# EAGLE board Grid (EAGLE 7.1.0), part 1 of 2
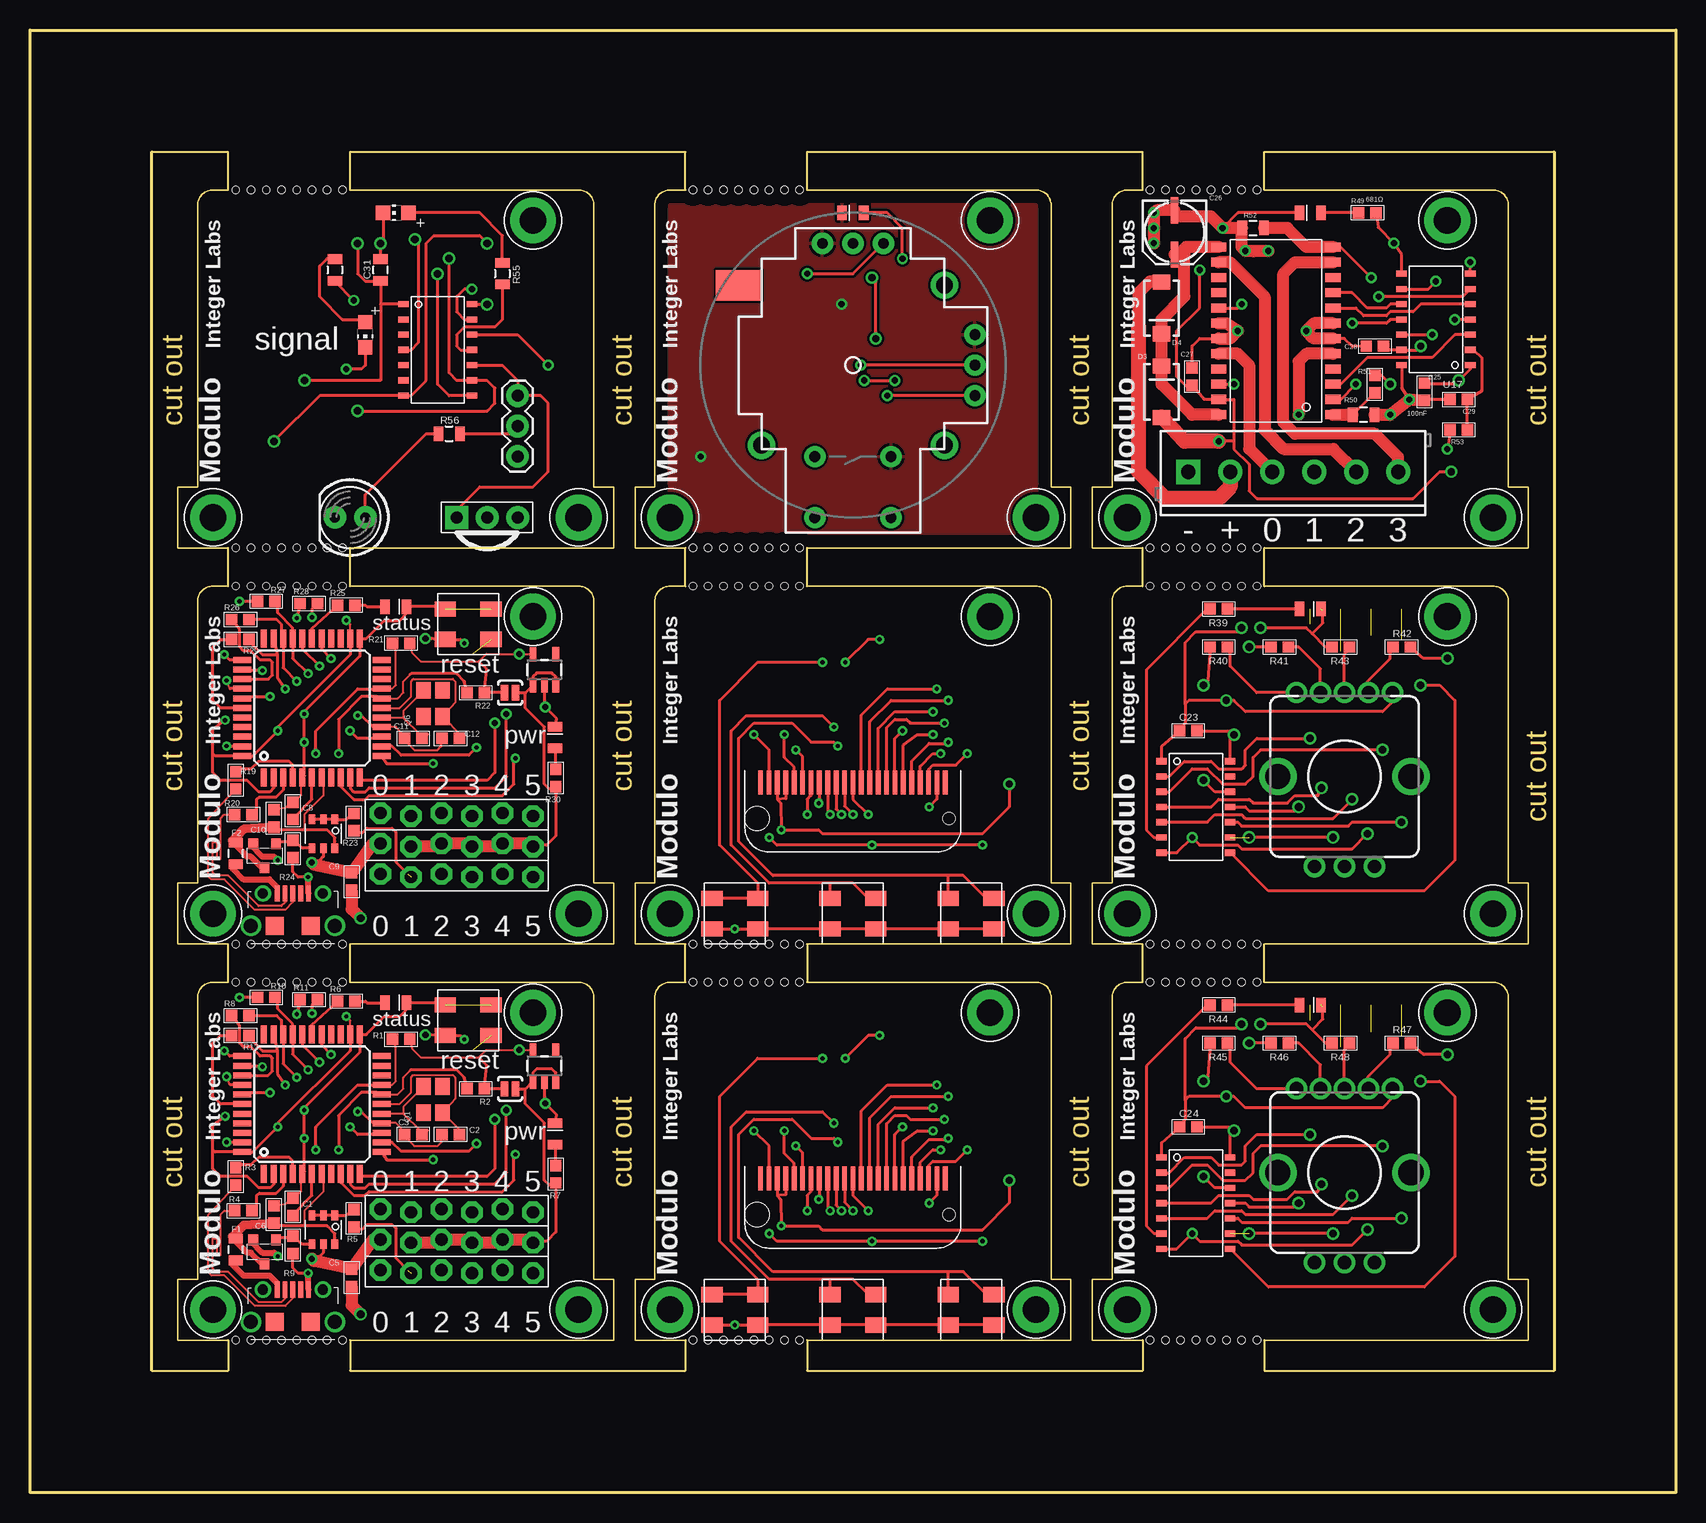
[diagram p0: board, top side]
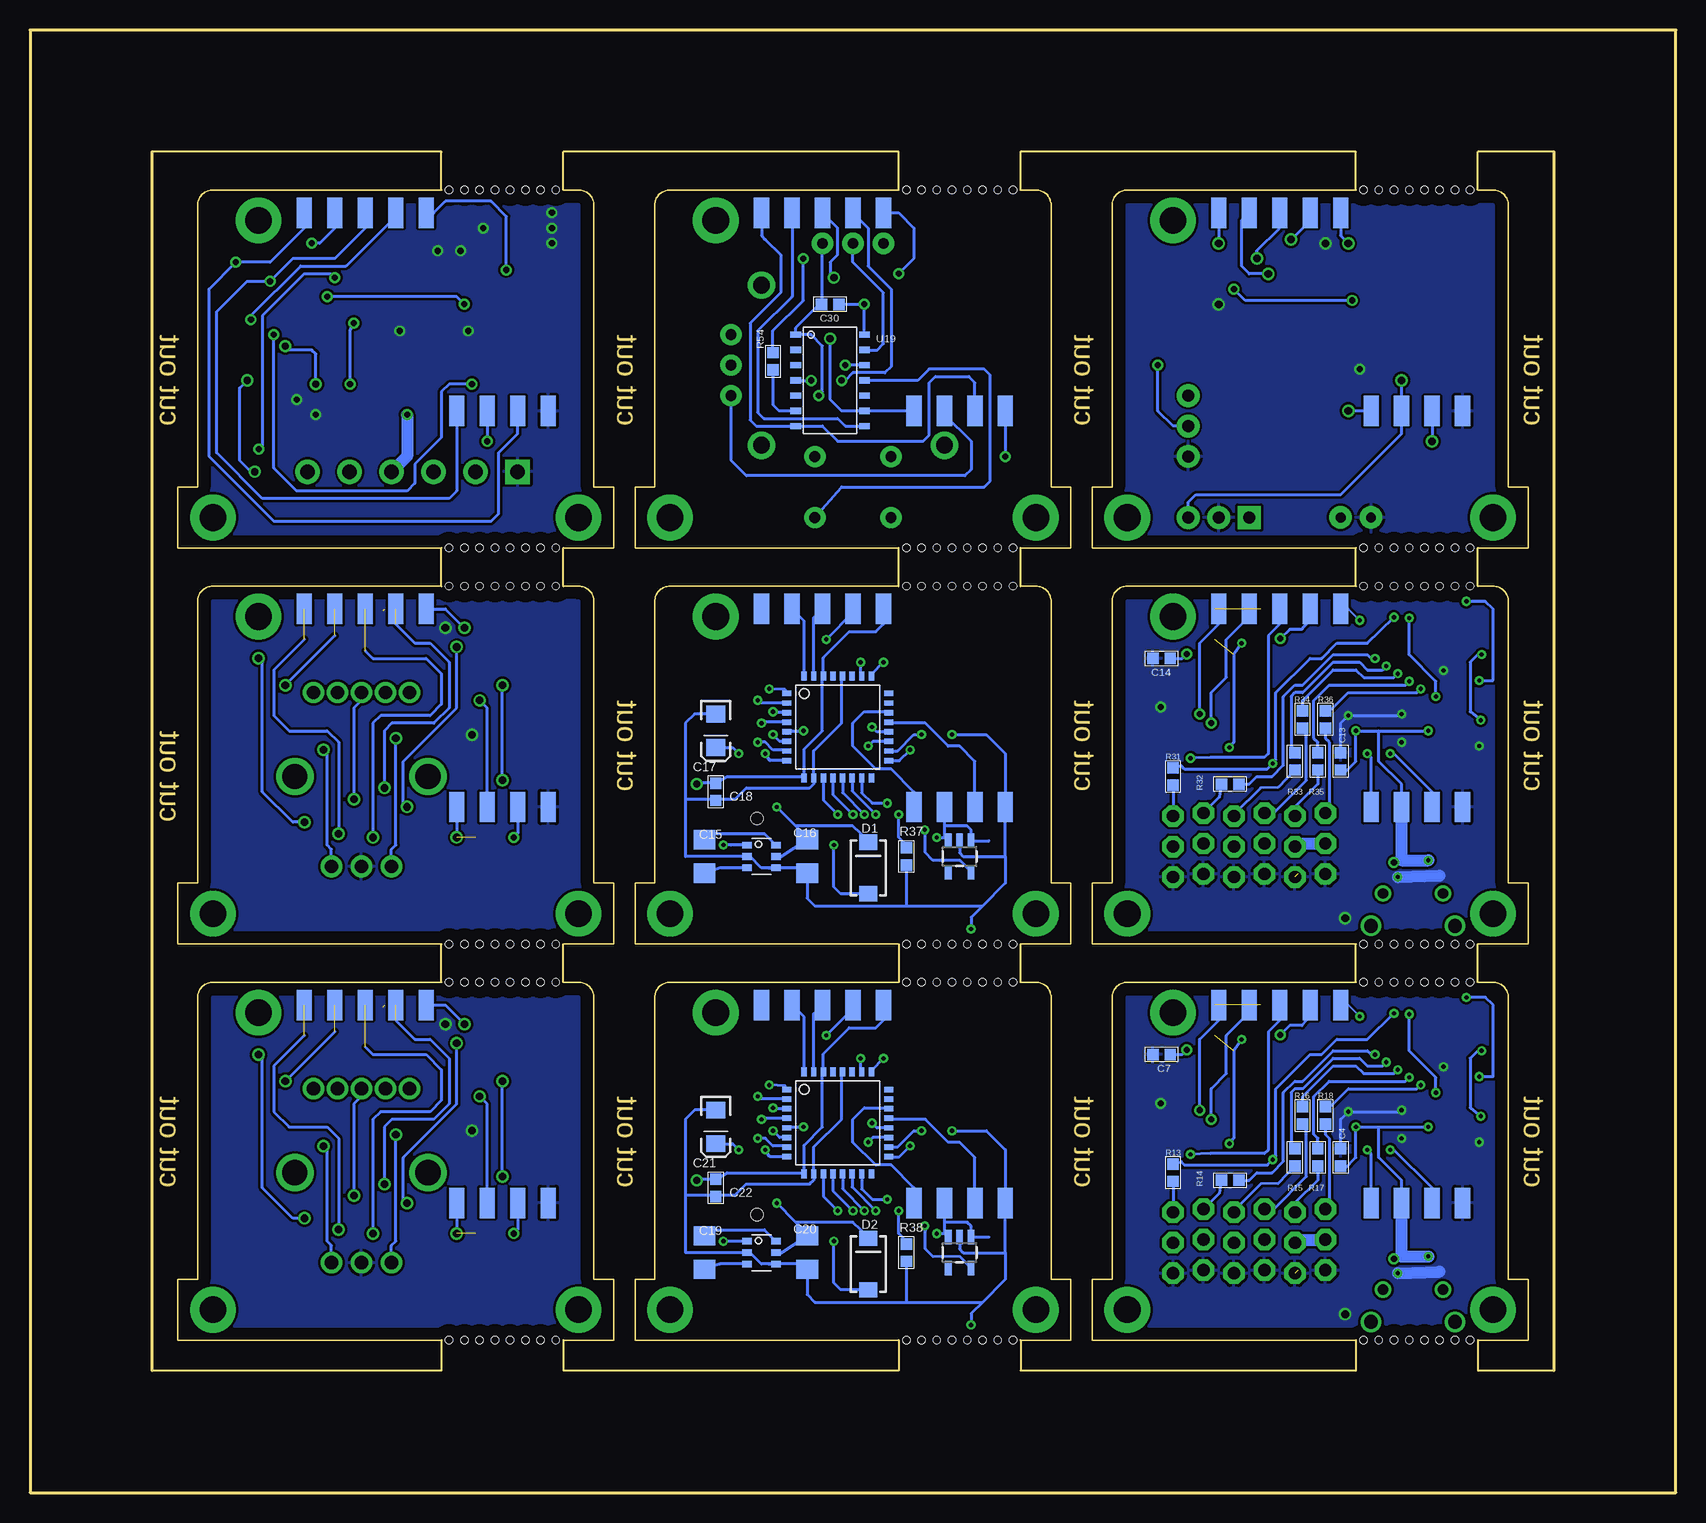
[diagram p1: board, bottom side, seen from below]

Size 137.16 x 121.92 mm. Coordinates in mm from the lower left corner, seen from the top.
Outline: 16.51,75.56 16.51,78.74
Outline: 54.61,75.56 54.61,78.74
Outline: 64.77,75.56 64.77,78.74
Outline: 26.67,75.56 26.67,78.74
Outline: 92.71,75.56 92.71,78.74
Outline: 102.87,75.56 102.87,78.74
Outline: 102.87,42.55 102.87,45.72
Outline: 92.71,42.55 92.71,45.72
Outline: 102.87,12.7 102.87,10.16 127,10.16 127,111.76 102.87,111.76 102.87,108.59
Outline: 54.61,12.7 54.61,10.16 26.67,10.16 26.67,12.7
Outline: 54.61,42.55 54.61,45.72
Outline: 64.77,12.7 64.77,10.16 92.71,10.16 92.71,12.7
Outline: 64.77,45.72 64.77,42.55
Outline: 26.67,42.55 26.67,45.72
Outline: 16.51,42.55 16.51,45.72
Outline: 16.51,108.59 16.51,111.76 10.16,111.76 10.16,10.16 16.51,10.16 16.51,12.7
Outline: 26.67,108.59 26.67,111.76 54.61,111.76 54.61,108.59
Outline: 64.77,108.59 64.77,111.76 92.71,111.76 92.71,108.59
Outline: 0,121.92 137.16,121.92 137.16,0 0,0 0,121.92
Copper layers (1*16): Top 0.035mm / dielectric 1.5mm / Bottom 0.035mm
Design rules "default": minimum track width 10mil, minimum drill 0.6mm, track to track 8mil, track to pad 8mil, pad to pad 8mil, via to via 8mil, smd to smd 8mil, copper to edge 40mil, drill to drill 8mil, minimum pad ring 10mil, minimum via ring 8mil, stop-mask expansion 4mil, vias tented up to drill 0mil, thermal gap 10mil

## Footprints (pad centres in the part's own frame; a part is rotated, then mirrored left to right if it is on the bottom)
0603 = smd 0.95 x 0.95: 1 -0.725,0; 2 0.725,0
C1206 = smd 1.6 x 1.8: 1 -1.4,0; 2 1.4,0
EIA3216 = smd 1.4 x 1.6: A 1.4,0; C -1.4,0
PANASONIC_C = smd 2.2 x 0.65: + 1.9,-0.2; - -1.8,-0.2
0805 = smd 0.8 x 1.2: 1 -0.9,0; 2 0.9,0
SMA-DIODE = smd 1.27 x 1.47: A -2.15,0; C 2.15,0
DEVICE-PCB-TABS = smd 1.27 x 2.54 bottom: BUS0 5.08,11.43; BUS1 7.62,11.43; BUS2 10.16,11.43; BUS3 12.7,11.43; PROG0 15.24,27.94; PROG1 17.78,27.94; PROG2 20.32,27.94; PROG3 22.86,27.94; PROG4 25.4,27.94 | drill 2.223 pad 3.81: P$1 2.54,2.54; P$2 33.02,2.54; P$3 29.21,27.305 | hole 0.6: 4.445,29.845; 5.715,29.845; 6.985,29.845; 8.255,29.845; 9.525,29.845; 10.795,29.845; 12.065,29.845; 13.335,29.845; 4.445,0; 5.715,0; 6.985,0; 8.255,0; 9.525,0; 10.795,0; 12.065,0; 13.335,0
1X06-BIGLOCK = drill 1.016 pad 1.778 octagon: 1 -6.35,0.127; 2 -3.81,-0.127; 3 -1.27,0.127; 4 1.27,-0.127; 5 3.81,0.127; 6 6.35,-0.127
SCREWTERMINAL-3.5MM-6 = drill 1.2 pad 2.032 square: 1 0,0 | drill 1.2 pad 2.032: 2 3.5,0; 3 7,0; 4 10.5,0; 5 14,0; 6 17.5,0
1X03 = drill 1.016 pad 1.88: 1 0,0; 2 2.54,0; 3 5.08,0
0805-LED = smd 1.2 x 0.8: A 0,-0.9; C 0,0.9
CHIP-LED0805 = smd 1.2 x 1.2: A 0,-1.05; C 0,1.05
LED5MM = drill 0.813 pad 1.88: A -1.27,0; K 1.27,0
NX3225 = smd 1.4 x 1.2: 1 -1.1,-0.8; 2 1.1,-0.8; 3 1.1,0.8; 4 -1.1,0.8
SOT-26 = smd 0.55 x 0.8: 1 -0.95,-1.2; 2 0,-1.2; 3 0.95,-1.2; 4 0.95,1.2; 5 0,1.2; 6 -0.95,1.2
MICRO3 = smd 0.8 x 0.9: 1 -0.95,-1; 2 0.95,-1; 3 0,1
SJ_2S-NO = smd 0.635 x 1.27: 1 -0.45,0; 2 0.45,0
BOURNS-7914J = smd 1.27 x 1.778: NEG$1 1.27,1.905; NEG$2 1.27,-1.905; POS$1 -1.27,1.905; POS$2 -1.27,-1.905
ENCODER_LED_3 = drill 1.1 pad 1.778: 1 -4,7; 2 -2,7; 3 0,7; 4 2,7; 5 4,7 | drill 1.1 pad 1.8: A -2.5,-7.5; B 2.5,-7.5; C 0,-7.5 | drill 2.1: M1 -5.55,0; M2 5.55,0
SOT23-5 = smd 0.55 x 1.2: 1 -0.95,-1.3; 2 0,-1.3; 3 0.95,-1.3; 4 0.95,1.3; 5 -0.95,1.3
SPARKFUN-DIGITALIC_TQFP44 = smd 1.5 x 0.5: 1 -5.8,4; 2 -5.8,3.2; 3 -5.8,2.4; 4 -5.8,1.6; 5 -5.8,0.8; 6 -5.8,0; 7 -5.8,-0.8; 8 -5.8,-1.6; 9 -5.8,-2.4; 10 -5.8,-3.2; 11 -5.8,-4; 23 5.8,-4; 24 5.8,-3.2; 25 5.8,-2.4; 26 5.8,-1.6; 27 5.8,-0.8; 28 5.8,0; 29 5.8,0.8; 30 5.8,1.6; 31 5.8,2.4; 32 5.8,3.2; 33 5.8,4 | smd 0.5 x 1.5: 12 -4,-5.8; 13 -3.2,-5.8; 14 -2.4,-5.8; 15 -1.6,-5.8; 16 -0.8,-5.8; 17 0,-5.8; 18 0.8,-5.8; 19 1.6,-5.8; 20 2.4,-5.8; 21 3.2,-5.8; 22 4,-5.8; 34 4,5.8; 35 3.2,5.8; 36 2.4,5.8; 37 1.6,5.8; 38 0.8,5.8; 39 0,5.8; 40 -0.8,5.8; 41 -1.6,5.8; 42 -2.4,5.8; 43 -3.2,5.8; 44 -4,5.8
USB-MICROB-FCI = smd 0.4 x 1.35: P1 -1.3,2.7; P2 -0.65,2.7; P3 0,2.7; P4 0.65,2.7; P5 1.3,2.7 | drill 0.85: S1 -2.5,2.7; S2 2.5,2.7 | drill 1.15: S3 -3.5,0; S6 3.5,0 | smd 1.5 x 1.5: S4 -1.5,0; S5 1.5,0
TQFP-32 = smd 0.75 x 0.45: 1 -4.25,2.8; 2 -4.25,2; 3 -4.25,1.2; 4 -4.25,0.4; 5 -4.25,-0.4; 6 -4.25,-1.2; 7 -4.25,-2; 8 -4.25,-2.8; 17 4.25,-2.8; 18 4.25,-2; 19 4.25,-1.2; 20 4.25,-0.4; 21 4.25,0.4; 22 4.25,1.2; 23 4.25,2; 24 4.25,2.8 | smd 0.45 x 0.75: 9 -2.8,-4.25; 10 -2,-4.25; 11 -1.2,-4.25; 12 -0.4,-4.25; 13 0.4,-4.25; 14 1.2,-4.25; 15 2,-4.25; 16 2.8,-4.25; 25 2.8,4.25; 26 2,4.25; 27 1.2,4.25; 28 0.4,4.25; 29 -0.4,4.25; 30 -1.2,4.25; 31 -2,4.25; 32 -2.8,4.25
FPC-24-REVERSE = smd 0.4 x 2: 1 7.7,1; 2 7,1; 3 6.3,1; 4 5.6,1; 5 4.9,1; 6 4.2,1; 7 3.5,1; 8 2.8,1; 9 2.1,1; 10 1.4,1; 11 0.7,1; 12 0,1; 13 -0.7,1; 14 -1.4,1; 15 -2.1,1; 16 -2.8,1; 17 -3.5,1; 18 -4.2,1; 19 -4.9,1; 20 -5.6,1; 21 -6.3,1; 22 -7,1; 23 -7.7,1 | hole 1: -8,4
SOIC14 = smd 0.508 x 0.889: 1 0,-3.175; 2 1.27,-3.175; 3 2.54,-3.175; 4 3.81,-3.175; 5 5.08,-3.175; 6 6.35,-3.175; 7 7.62,-3.175; 8 7.62,2.54; 9 6.35,2.54; 10 5.08,2.54; 11 3.81,2.54; 12 2.54,2.54; 13 1.27,2.54; 14 0,2.54
SOIC-14 = smd 0.508 x 0.889: 1 0,-3.175; 2 1.27,-3.175; 3 2.54,-3.175; 4 3.81,-3.175; 5 5.08,-3.175; 6 6.35,-3.175; 7 7.62,-3.175; 8 7.62,2.54; 9 6.35,2.54; 10 5.08,2.54; 11 3.81,2.54; 12 2.54,2.54; 13 1.27,2.54; 14 0,2.54
SOP-24-E3 = smd 0.762 x 1.27: 1 -6.35,-4.445; 2 -5.08,-4.445; 3 -3.81,-4.445; 4 -2.54,-4.445; 5 -1.27,-4.445; 6 0,-4.445; 7 1.27,-4.445; 8 2.54,-4.445; 9 3.81,-4.445; 10 5.08,-4.445; 11 6.35,-4.445; 12 7.62,-4.445; 13 7.62,5.08; 14 6.35,5.08; 15 5.08,5.08; 16 3.81,5.08; 17 2.54,5.08; 18 1.27,5.08; 19 0,5.08; 20 -1.27,5.08; 21 -2.54,5.08; 22 -3.81,5.08; 23 -5.08,5.08; 24 -6.35,5.08
JOYSTICK = drill 0.9 pad 1.778: B1A -3.175,12.7; B1B 3.175,12.7; B2A -3.175,7.62; B2B 3.175,7.62 | drill 0.889 pad 1.778: H1 -2.54,-10.16; H2 0,-10.16; H3 2.54,-10.16; V1 -10.16,2.54; V2 -10.16,0; V3 -10.16,-2.54 | drill 1.397 pad 2.286: MOUNT1 -7.62,6.668; MOUNT2 -7.62,-6.668; MOUNT4 7.62,6.668 | smd 3.81 x 2.54: MOUNT3 9.525,-6.668
PNA460XM = drill 1.016 pad 1.93 square: 1 -2.54,0 | drill 1.016 pad 1.93: 2 0,0; 3 2.54,0

## Placement (x,y rotation side)
C1  1uF  [0603]  21.91,23.81 90 top
C2  18pF  [0603]  35.05,29.84 180 top
C3  18pF  [0603]  31.94,29.84 180 top
C4  100nF  [0603]  27.94,27.94 90 bottom
C5  10uF  [0603]  26.8,17.91 270 top
C6  10uF  [0603]  20.32,23.18 90 top
C7  100nF  [0603]  42.86,36.51 180 bottom
C8  1uF  [0603]  21.91,56.83 90 top
C9  10uF  [0603]  26.8,50.93 270 top
C10  10uF  [0603]  20.32,56.2 90 top
C11  18pF  [0603]  31.94,62.86 180 top
C12  18pF  [0603]  35.05,62.86 180 top
C13  100nF  [0603]  27.94,60.96 90 bottom
C14  100nF  [0603]  42.86,69.53 180 bottom
C15  10uF  [C1206]  80.96,53.02 270 bottom
C16  10uF  [C1206]  72.39,53.02 270 bottom
C17  T491A475M020AT  [EIA3216]  80.01,63.5 270 bottom
C18  100nF  [0603]  80.01,58.42 270 bottom
C19  10uF  [C1206]  80.96,20 270 bottom
C20  10uF  [C1206]  72.39,20 270 bottom
C21  T491A475M020AT  [EIA3216]  80.01,30.48 270 bottom
C22  100nF  [0603]  80.01,25.4 270 bottom
C23  100nF  [0603]  96.52,63.5 0 top
C24  100nF  [0603]  96.52,30.48 0 top
C25  100nF  [0603]  116.2,91.76 90 top
C26  [PANASONIC_C]  95.57,105.09 270 top
C27  100nF  [0603]  96.84,93.03 90 top
C28  100nF  [0603]  112.08,95.57 180 top
C29  100nF  [0603]  119.06,91.12 180 top
C30  100nF  [0603]  70.48,99.06 180 bottom
C31  .47uF  [0805]  29.21,101.92 90 top
D1  SSA33L-E3/61T  [SMA-DIODE]  67.31,52.07 90 bottom
D2  SSA33L-E3/61T  [SMA-DIODE]  67.31,19.05 90 bottom
D3  [SMA-DIODE]  94.3,91.76 90 top
D4  [SMA-DIODE]  94.3,98.74 270 top
F1  MF-PSMF110X-2  [0805]  17.14,20.26 90 top
F2  MF-PSMF110X-2  [0805]  17.14,53.28 90 top
FOOTPRINT  DEVICE-PCB-TABS  [DEVICE-PCB-TABS]  12.7,12.7 0 top
FOOTPRINT1  DEVICE-PCB-TABS  [DEVICE-PCB-TABS]  12.7,45.72 0 top
JP1  [1X06-BIGLOCK]  35.56,23.49 180 top
JP2  [1X06-BIGLOCK]  35.56,18.41 0 top
JP3  [1X06-BIGLOCK]  35.56,20.95 0 top
JP4  [1X06-BIGLOCK]  35.56,56.52 180 top
JP5  [1X06-BIGLOCK]  35.56,51.44 0 top
JP6  [1X06-BIGLOCK]  35.56,53.97 0 top
JP7  [SCREWTERMINAL-3.5MM-6]  96.52,85.09 0 top
JP8  [1X03]  40.64,86.36 90 top
LED  blue  [0805-LED]  106.68,106.68 90 top
LED1  blue  [0805-LED]  30.48,40.83 270 top
LED2  blue  [0805-LED]  43.75,29.91 0 top
LED3  blue  [0805-LED]  30.48,73.85 270 top
LED4  blue  [0805-LED]  43.75,62.93 0 top
LED5  blue  [0805-LED]  106.68,73.66 270 top
LED6  blue  [0805-LED]  106.68,40.64 270 top
LED7  blue  [0805-LED]  68.58,106.68 90 top
LED8  [CHIP-LED0805]  30.48,106.68 90 top
LED9  [LED5MM]  26.67,81.28 180 top
LED10  [CHIP-LED0805]  27.94,96.52 180 top
PCB1  DEVICE-PCB-TABS  [DEVICE-PCB-TABS]  50.8,45.72 0 top
PCB2  DEVICE-PCB-TABS  [DEVICE-PCB-TABS]  50.8,12.7 0 top
PCB3  DEVICE-PCB-TABS  [DEVICE-PCB-TABS]  88.9,45.72 0 top
PCB4  DEVICE-PCB-TABS  [DEVICE-PCB-TABS]  88.9,12.7 0 top
PCB5  DEVICE-PCB-TABS  [DEVICE-PCB-TABS]  88.9,78.74 0 top
Q1  16Mhz  [NX3225]  33.59,32.77 90 top
Q2  DMMT5401  [SOT-26]  24.45,21.91 180 top
Q3  DMG2305UX  [MICRO3]  19.56,20.07 180 top
Q4  DMMT5401  [SOT-26]  24.45,54.93 180 top
Q5  DMG2305UX  [MICRO3]  19.56,53.09 180 top
Q6  16Mhz  [NX3225]  33.59,65.79 90 top
R1  1.5KΩ  [0603]  30.92,37.78 180 top
R2  1.5KΩ  [0603]  37.15,33.66 180 top
R3  22Ω  [0603]  17.14,26.35 90 top
R4  22Ω  [0603]  17.78,23.49 0 top
R5  10KΩ  [0603]  26.99,22.86 90 top
R6  681Ω  [0603]  26.35,40.96 0 top
R7  681Ω  [0603]  43.81,26.54 90 top
R8  1.5KΩ  [0603]  17.53,39.75 0 top
R9  47KΩ  [0603]  21.91,20.64 90 top
R10  1.5KΩ  [0603]  19.68,41.27 0 top
R11  1.5KΩ  [0603]  23.24,41.08 0 top
R12  1.5KΩ  [0603]  17.53,38.1 0 top
R13  150Ω  [0603]  41.91,26.67 270 bottom
R14  150Ω  [0603]  37.15,26.04 180 bottom
R15  150Ω  [0603]  31.75,27.94 270 bottom
R16  150Ω  [0603]  31.11,31.43 270 bottom
R17  150Ω  [0603]  29.84,27.94 270 bottom
R18  150Ω  [0603]  29.21,31.43 270 bottom
R19  22Ω  [0603]  17.14,59.37 90 top
R20  22Ω  [0603]  17.78,56.52 0 top
R21  1.5KΩ  [0603]  30.92,70.8 180 top
R22  1.5KΩ  [0603]  37.15,66.67 180 top
R23  10KΩ  [0603]  26.99,55.88 90 top
R24  47KΩ  [0603]  21.91,53.66 90 top
R25  681Ω  [0603]  26.35,73.98 0 top
R26  1.5KΩ  [0603]  17.53,72.77 0 top
R27  1.5KΩ  [0603]  19.68,74.3 0 top
R28  1.5KΩ  [0603]  23.24,74.1 0 top
R29  1.5KΩ  [0603]  17.53,71.12 0 top
R30  681Ω  [0603]  43.81,59.56 90 top
R31  150Ω  [0603]  41.91,59.69 270 bottom
R32  150Ω  [0603]  37.15,59.05 180 bottom
R33  150Ω  [0603]  31.75,60.96 270 bottom
R34  150Ω  [0603]  31.11,64.45 270 bottom
R35  150Ω  [0603]  29.84,60.96 270 bottom
R36  150Ω  [0603]  29.21,64.45 270 bottom
R37  700k  [0603]  64.14,53.02 270 bottom
R38  700k  [0603]  64.14,20 270 bottom
R39  681Ω  [0603]  99.06,73.66 180 top
R40  130  [0603]  99.06,70.48 180 top
R41  68.1Ω  [0603]  104.14,70.48 180 top
R42  68.1Ω  [0603]  114.3,70.48 0 top
R43  2k  [0603]  109.22,70.48 180 top
R44  681Ω  [0603]  99.06,40.64 180 top
R45  130  [0603]  99.06,37.47 180 top
R46  68.1Ω  [0603]  104.14,37.47 180 top
R47  68.1Ω  [0603]  114.3,37.47 0 top
R48  2k  [0603]  109.22,37.47 180 top
R49  681Ω  [0603]  111.44,106.68 0 top
R50  .05  [0805]  111.12,89.85 180 top
R51  1.5KΩ  [0603]  112.08,92.39 270 top
R52  .05  [0805]  101.92,105.41 0 top
R53  1.5KΩ  [0603]  119.06,88.58 180 top
R54  681Ω  [0603]  75.25,94.3 270 bottom
R55  680  [0805]  39.37,101.6 270 top
R56  130  [0805]  34.92,88.27 0 top
R57  680  [0805]  25.4,101.92 270 top
SJ1  SOLDERJUMPERNO  [SJ_2S-NO]  40,33.66 180 top
SJ2  SOLDERJUMPERNO  [SJ_2S-NO]  40,66.67 180 top
SW1  blue  [BOURNS-7914J]  36.51,39.37 90 top
SW2  blue  [BOURNS-7914J]  36.51,72.39 90 top
SW3  7914J-1-000E  [BOURNS-7914J]  58.74,48.26 270 top
SW4  7914J-1-000E  [BOURNS-7914J]  68.58,48.26 270 top
SW5  7914J-1-000E  [BOURNS-7914J]  78.42,48.26 270 top
SW6  7914J-1-000E  [BOURNS-7914J]  58.74,15.24 270 top
SW7  7914J-1-000E  [BOURNS-7914J]  68.58,15.24 270 top
SW8  7914J-1-000E  [BOURNS-7914J]  78.42,15.24 270 top
SW9  TopUp EC12PLRGBSDVBF-D  [ENCODER_LED_3]  109.54,59.69 0 top
SW10  TopUp EC12PLRGBSDVBF-D  [ENCODER_LED_3]  109.54,26.67 0 top
U1  MIC5205-3.3YM5 TR  [SOT23-5]  42.86,35.56 0 top
U2  ATMEGA32U4TQFP  [SPARKFUN-DIGITALIC_TQFP44]  23.49,32.38 90 top
U3  USBFCI-MICROB  [USB-MICROB-FCI]  21.91,14.22 0 top
U4  ATMEGA32U4TQFP  [SPARKFUN-DIGITALIC_TQFP44]  23.49,65.41 90 top
U5  USBFCI-MICROB  [USB-MICROB-FCI]  21.91,47.24 0 top
U6  MIC5205-3.3YM5 TR  [SOT23-5]  42.86,68.58 0 top
U7  MIC5205-3.3YM5 TR  [SOT23-5]  59.69,53.02 180 bottom
U8  ATSAMD21E18A-AU  [TQFP-32]  69.85,63.82 0 bottom
U9  LM2665M6/NOPB  [SOT-26]  76.2,53.02 270 bottom
U10  ER-OLED0.95-2C  [FPC-24-REVERSE]  68.58,60.2 180 top
U11  MIC5205-3.3YM5 TR  [SOT23-5]  59.69,20 180 bottom
U12  ATSAMD21E18A-AU  [TQFP-32]  69.85,30.8 0 bottom
U13  LM2665M6/NOPB  [SOT-26]  76.2,20 270 bottom
U14  ER-OLED0.95-2C  [FPC-24-REVERSE]  68.58,27.18 180 top
U15  attiny841-ssur  [SOIC14]  97.47,60.96 270 top
U16  attiny841-ssur  [SOIC14]  97.47,27.94 270 top
U17  ATTINY841  [SOIC-14]  116.84,93.98 90 top
U18  NJM2670  [SOP-24-E3]  104.14,96.2 90 top
U19  ATTINY841  [SOIC-14]  70.17,96.52 270 bottom
U20  JOYSTICKPTH  [JOYSTICK]  68.58,93.98 180 top
U$1  PNA460XM  [PNA460XM]  38.1,81.28 0 top
U$2  TINY841  [SOIC14]  34.29,99.06 270 top
U$3  DEVICE-PCB-TABS  [DEVICE-PCB-TABS]  12.7,78.74 0 top
U$7  DEVICE-PCB-TABS  [DEVICE-PCB-TABS]  50.8,78.74 0 top

## Library data of the parts
C1 C8 = Modulo; PARTNUM: C0603C105K4RACTU
C2 C3 C11 C12 = Modulo; PARTNUM: C0603C180J5GACTU
C4 C7 C13 C14 C18 C22-C25 C27-C30 = Modulo; PARTNUM: C0603C104K5RACTU
C5 C6 C9 C10 = Modulo; PARTNUM: GRM188R60J106ME47D
C15 C16 C19 C20 = Modulo; PARTNUM: CL31A106KAHNNNE
C17 C21 = SparkFun-Capacitors; PROD_ID: CAP-00811
C26 = SparkFun-Capacitors; PARTNUM: EEE-0JA101WR
C31 R55-R57 U15 U16 U$2 = IntegerLabs
D1-D4 = SparkFun-DiscreteSemi; PARTNUM: SSA33L-E3/61T
F1 F2 = Modulo; PARTNUM: MF-PSFM110X-2
FOOTPRINT FOOTPRINT1 PCB5 R37 R38 R40 R43 R45 R48 SW3-SW8 U7-U9 U11-U13 U$3 U$7 = Modulo
JP1-JP6 = adafruit; PARTNUM: PREC006SAAN-RC
JP7 = SparkFun-Connectors; PARTNUM: OSTTE060104
JP8 = SparkFun-Connectors
LED LED1-LED7 = Modulo; PARTNUM: LTST-C171TBKT
LED8 LED10 U$1 = adafruit
LED9 = SparkFun-LED
PCB1 PCB2 = Modulo; BOARD: Display; VERSION: 2
PCB3 PCB4 = Modulo; NOBOM: 1
Q1 Q6 = Modulo; PARTNUM: CX3225GB16000D0HEQCC
Q2 Q4 = IntegerLabs; PARTNUM: DMMT5401
Q3 Q5 = transistor-power; PARTNUM: DMG2305UX
R1 R2 R8 R10-R12 R21 R22 R26-R29 R51 R53 = Modulo; PARTNUM: ERJ-3EKF1501V
R3 R4 R19 R20 = Modulo; PARTNUM: ERJ-3EKF22R0V
R5 R23 = Modulo; PARTNUM: ERJ-3EKF1002V
R6 R7 R25 R30 R39 R44 R49 R54 = Modulo; PARTNUM: ERJ-3EKF6810V
R9 R24 = Modulo; PARTNUM: ERJ-3EKF4702V
R13-R18 R31-R36 = Modulo; PARTNUM: ERJ-3EKF1500V
R41 R42 R46 R47 = Modulo; PARTNUM: ERJ-3EKF68R1V
R50 R52 = Modulo; PARTNUM: CSR0805FKR500
SJ1 SJ2 = SparkFun-Passives; PARTNUM: EXCLUDE
SW1 SW2 = Modulo; PARTNUM: 7914J-1-000E
SW9 SW10 = SparkFun-Electromechanical
U1 U6 = Modulo; PARTNUM: MIC5205-3.3YM5 TR
U2 U4 = SparkFun-DigitalIC; PARTNUM: ATMEGA32U4TQFP; PROD_ID: IC-11161
U3 U5 = IntegerLabs; PARTNUM: 10118193-0001LF
U10 U14 = Modulo; MANUFACTURER: buydisplay.com; SUPPLIER: buydisplay.com
U17 U19 = Modulo; PARTNUM: ATTINY841-SSUR
U18 = IntegerLabs; PARTNUM: NJM2670E3
U20 = IntegerLabs; PARTNUM: https://www.sparkfun.com/products/9032

## Nets
+3.3V: C7.1 R1.1 R2.1 SJ1.2 U1.5
+3.3V1: C14.1 R21.1 R22.1 SJ2.2 U6.5
+3.3V2: C18.1 PCB1.PROG0 U7.5 U8.9 U8.30 U10.3 U10.4
+3.3V3: C22.1 PCB2.PROG0 U11.5 U12.9 U12.30 U14.3 U14.4
+5V: D1.A PCB1.BUS2 U7.1 U7.3 U9.1
+5V1: D2.A PCB2.BUS2 U11.1 U11.3 U13.1
+10V: C16.1 D1.C U9.5 U10.22
+10V1: C20.1 D2.C U13.5 U14.22
A: SW9.A U15.2
A1: SW10.A U16.2
B: SW9.B U15.3
B1: SW10.B U16.3
BLUE: R42.2 U15.10
BLUE1: R47.2 U16.10
BS0: U8.17 U10.6
BS1: U8.18 U10.5
BS2: U12.18 U14.5
BS3: U12.17 U14.6
BUTTON1: SW3.POS$1 SW3.POS$2 U8.25
BUTTON2: SW4.POS$1 SW4.POS$2 U8.20
BUTTON3: SW5.POS$1 SW5.POS$2 U8.19
BUTTON4: SW6.POS$1 SW6.POS$2 U12.25
BUTTON5: SW7.POS$1 SW7.POS$2 U12.20
BUTTON6: SW8.POS$1 SW8.POS$2 U12.19
CS: U8.15 U10.8
CS1: U12.15 U14.8
D0: R12.2 R18.1 U2.32
D1: R8.2 R17.1 U2.31
D2: R10.2 R16.1 U2.30
D3: R15.1 U2.29
D4: R14.1 U2.27
D5: R11.2 R13.1 U2.12
D6: R26.2 R35.1 U4.31
D7: R32.1 U4.27
D8: R33.1 U4.29
D9: R29.2 R36.1 U4.32
D10: R27.2 R34.1 U4.30
D11: R28.2 R31.1 U4.12
D12: U8.1 U10.13
D13: U8.2 U10.14
D14: U8.3 U10.15
D15: U8.4 U10.16
D16: U8.5 U10.17
D17: U8.6 U10.18
D18: U8.7 U10.19
D19: U8.8 U10.20
D20: U12.1 U14.13
D21: U12.2 U14.14
D22: U12.3 U14.15
D23: U12.4 U14.16
D24: U12.5 U14.17
D25: U12.6 U14.18
D26: U12.7 U14.19
D27: U12.8 U14.20
D+: R3.1 U3.P3
D+1: R19.1 U5.P3
D-: R4.1 U3.P2
D-1: R20.1 U5.P2
D/C: U8.13 U10.10
D/C1: U12.13 U14.10
DATA_LED: R57.2 U$2.13
DISPLAY_RESET: U8.14 U10.9
DISPLAY_RESET1: U12.14 U14.9
ENABLEA: U17.3 U18.3
ENABLEB: U17.10 U18.9
G1: Q1.2
G2: Q1.4
G3: Q6.2
G4: Q6.4
GND: C1.2 C2.2 C3.2 C4.2 C5.2 C6.2 C7.2 FOOTPRINT.BUS0 JP2.1 JP2.2 JP2.3 JP2.4 JP2.5 JP2.6 LED1.C LED2.C R5.1 R9.1 SW1.NEG$1 SW1.NEG$2 U1.2 U2.5 U2.15 U2.23 U2.35 U2.43 U3.P5
GND1: C8.2 C9.2 C10.2 C11.2 C12.2 C13.2 C14.2 FOOTPRINT1.BUS0 JP5.1 JP5.2 JP5.3 JP5.4 JP5.5 JP5.6 LED3.C LED4.C R23.1 R24.1 SW2.NEG$1 SW2.NEG$2 U4.5 U4.15 U4.23 U4.35 U4.43 U5.P5 U6.2
GND2: C16.2 C17.C C18.2 PCB1.BUS0 R37.2 SW3.NEG$1 SW3.NEG$2 SW4.NEG$1 SW4.NEG$2 SW5.NEG$1 SW5.NEG$2 U7.2 U8.10 U8.28 U9.2 U9.4 U10.2
GND3: C20.2 C21.C C22.2 PCB2.BUS0 R38.2 SW6.NEG$1 SW6.NEG$2 SW7.NEG$1 SW7.NEG$2 SW8.NEG$1 SW8.NEG$2 U11.2 U12.10 U12.28 U13.2 U13.4 U14.2
GND4: C23.2 LED5.C PCB3.BUS0 R43.2 SW9.C U15.14
GND5: C24.2 LED6.C PCB4.BUS0 R48.2 SW10.C U16.14
GND6: C25.1 C26.- C27.2 C28.2 C29.2 JP7.1 LED.C PCB5.BUS0 R50.1 R52.1 U17.14 U18.6 U18.7 U18.18 U18.19
GND7: C30.1 LED7.C U19.14 U20.B2A U20.H3 U20.V3 U$7.BUS0
GND8: C31.2 JP8.1 LED8.C LED9.K LED10.C U$1.2 U$2.14 U$3.BUS0
GREEN: R41.2 U15.11
GREEN1: R46.2 U16.11
H: U19.13 U20.H2
IN0: U17.11 U18.2
IN1: U17.12 U18.22
IN2: U17.5 U18.8
IN3: U17.6 U18.17
IR_LED: JP8.2 R56.2 U$2.12
IR_SENSE: JP8.3 U$1.1 U$2.10
LED: R6.1 U2.28
LED1: R25.1 U4.28
LED2: R39.2 U15.6
LED3: R44.2 U16.6
LED4: R54.2 U19.6
LED5: R55.2 U$2.11
MISO: FOOTPRINT.PROG3 U2.11
MISO1: FOOTPRINT1.PROG3 U4.11
MISO2: PCB3.PROG3 U15.8
MISO3: PCB4.PROG3 U16.8
MISO4: U19.8 U$7.PROG3
MISO5: U$2.8 U$3.PROG3
MISO/LED: PCB5.PROG3 R49.2 U17.8
MOSI: FOOTPRINT.PROG4 U2.10
MOSI1: FOOTPRINT1.PROG4 U4.10
N$1: C1.1 U2.6
N$2: JP1.1 R13.2
N$3: F1.1 U3.P1
N$4: C3.1 Q1.3 U2.16
N$5: LED1.A R6.2
N$6: R12.1 U2.39
N$7: R11.1 U2.38
N$8: R3.2 U2.4
N$9: R4.2 U2.3
N$10: R10.1 U2.37
N$11: R8.1 U2.36
N$12: LED2.A R7.2
N$13: JP1.2 R14.2
N$14: Q2.1 Q2.2 Q2.3 R5.2
N$15: C2.1 Q1.1 U2.17
N$16: Q2.4 Q3.1 R9.2
N$17: JP1.3 R15.2
N$18: JP1.4 R16.2
N$19: JP1.5 R17.2
N$20: JP1.6 R18.2
N$21: C8.1 U4.6
N$22: R19.2 U4.4
N$23: R20.2 U4.3
N$24: Q4.1 Q4.2 Q4.3 R23.2
N$25: Q4.4 Q5.1 R24.2
N$26: F2.1 U5.P1
N$27: LED3.A R25.2
N$28: C11.1 Q6.3 U4.16
N$29: R29.1 U4.39
N$30: R28.1 U4.38
N$31: R27.1 U4.37
N$32: R26.1 U4.36
N$33: LED4.A R30.2
N$34: C12.1 Q6.1 U4.17
N$35: JP4.1 R31.2
N$36: JP4.2 R32.2
N$37: JP4.3 R33.2
N$38: JP4.4 R34.2
N$39: JP4.5 R35.2
N$40: JP4.6 R36.2
N$42: C15.1 U9.6
N$43: C15.2 U9.3
N$44: C17.A U10.21
N$45: R37.1 U10.7
N$47: C19.1 U13.6
N$48: C19.2 U13.3
N$49: C21.A U14.21
N$50: R38.1 U14.7
N$51: LED5.A R39.1
N$52: R40.1 SW9.1
N$53: R41.1 SW9.2
N$54: R42.1 SW9.4
N$55: LED6.A R44.1
N$56: R45.1 SW10.1
N$57: R46.1 SW10.2
N$58: R47.1 SW10.4
N$59: LED.A R49.1
N$60: R50.2 R51.2 U18.1
N$61: R52.2 R53.2 U18.12
N$62: LED7.A R54.1
N$63: LED8.A R55.1
N$64: LED9.A R56.1
N$65: LED10.A R57.1
OUT0: JP7.4 U18.5
OUT1: JP7.3 U18.20
OUT2: JP7.5 U18.14
OUT3: JP7.6 U18.11
RD: U8.11 U10.12
RD1: U12.11 U14.12
RED: R40.2 U15.12
RED1: R45.2 U16.12
RESET: FOOTPRINT.PROG1 SW1.POS$1 SW1.POS$2 U2.13
RESET1: FOOTPRINT1.PROG1 SW2.POS$1 SW2.POS$2 U4.13
RESET2: PCB1.PROG1 U8.26
RESET3: PCB2.PROG1 U12.26
RESET4: PCB3.PROG1 U15.4
RESET5: PCB4.PROG1 U16.4
RESET6: PCB5.PROG1 U17.4
RESET7: U19.4 U$7.PROG1
RESET8: U$2.4 U$3.PROG1
SCK: FOOTPRINT.PROG2 U2.9
SCK1: FOOTPRINT1.PROG2 U4.9
SCL: FOOTPRINT.BUS3 R2.2 U2.18
SCL1: FOOTPRINT1.BUS3 R22.2 U4.18
SCL2: PCB1.BUS3 U8.22
SCL3: PCB2.BUS3 U12.22
SCL/SCK: PCB3.BUS3 PCB3.PROG2 U15.9
SCL/SCK1: PCB4.BUS3 PCB4.PROG2 U16.9
SCL/SCK2: PCB5.BUS3 PCB5.PROG2 U17.9
SCL/SCK3: U19.9 U$7.BUS3 U$7.PROG2
SCL/SCK4: U$2.9 U$3.BUS3 U$3.PROG2
SDA: FOOTPRINT.BUS1 R1.2 U2.19
SDA1: FOOTPRINT1.BUS1 R21.2 U4.19
SDA2: PCB1.BUS1 U8.21
SDA3: PCB2.BUS1 U12.21
SDA/MOSI: PCB3.BUS1 PCB3.PROG4 U15.7
SDA/MOSI1: PCB4.BUS1 PCB4.PROG4 U16.7
SDA/MOSI2: PCB5.BUS1 PCB5.PROG4 U17.7
SDA/MOSI3: U19.7 U$7.BUS1 U$7.PROG4
SDA/MOSI4: U$2.7 U$3.BUS1 U$3.PROG4
SEL: U19.11 U20.B1A
SENSEA: C28.1 R51.1 U17.13
SENSEB: C29.1 R53.1 U17.2
SW: R43.1 SW9.3 U15.5
SW1: R48.1 SW10.3 U16.5
SWCLK: PCB1.PROG2 U8.31
SWCLK1: PCB2.PROG2 U12.31
SWDIO: PCB1.PROG3 U8.32
SWDIO1: PCB2.PROG3 U12.32
TSD: U18.16
V: U19.12 U20.V2
VBUS: C6.1 F1.2 Q2.6 Q3.3 U2.7
VBUS1: C10.1 F2.2 Q4.6 Q5.3 U4.7
VCC: C4.1 C5.1 FOOTPRINT.BUS2 FOOTPRINT.PROG0 JP3.1 JP3.2 JP3.3 JP3.4 JP3.5 JP3.6 Q2.5 Q3.2 R7.1 SJ1.1 U1.1 U1.3 U2.2 U2.14 U2.24 U2.34 U2.44
VCC1: C9.1 C13.1 FOOTPRINT1.BUS2 FOOTPRINT1.PROG0 JP6.1 JP6.2 JP6.3 JP6.4 JP6.5 JP6.6 Q4.5 Q5.2 R30.1 SJ2.1 U4.2 U4.14 U4.24 U4.34 U4.44 U6.1 U6.3
VCC2: C23.1 PCB3.BUS2 PCB3.PROG0 SW9.5 U15.1
VCC3: C24.1 PCB4.BUS2 PCB4.PROG0 SW10.5 U16.1
VCC4: C25.2 C27.1 D3.A PCB5.BUS2 PCB5.PROG0 U17.1 U18.23
VCC5: C30.2 U19.1 U20.H1 U20.V1 U$7.BUS2 U$7.PROG0
VCC6: C31.1 U$1.3 U$2.1 U$3.BUS2 U$3.PROG0
VIN: D4.A JP7.2
VS: C26.+ D3.C D4.C U18.13 U18.24
WR: U8.12 U10.11
WR1: U12.12 U14.11